# Altium PCB Final PCB.PcbDoc
Units mm, origin at the board's own origin, x right, y up, seen from the top; angles counter-clockwise.
Board outline 122.55 x 36.83 mm, 2 copper layers (Top Layer, Bottom Layer); 53 components, 47 nets, 187 pads, 0 vias.
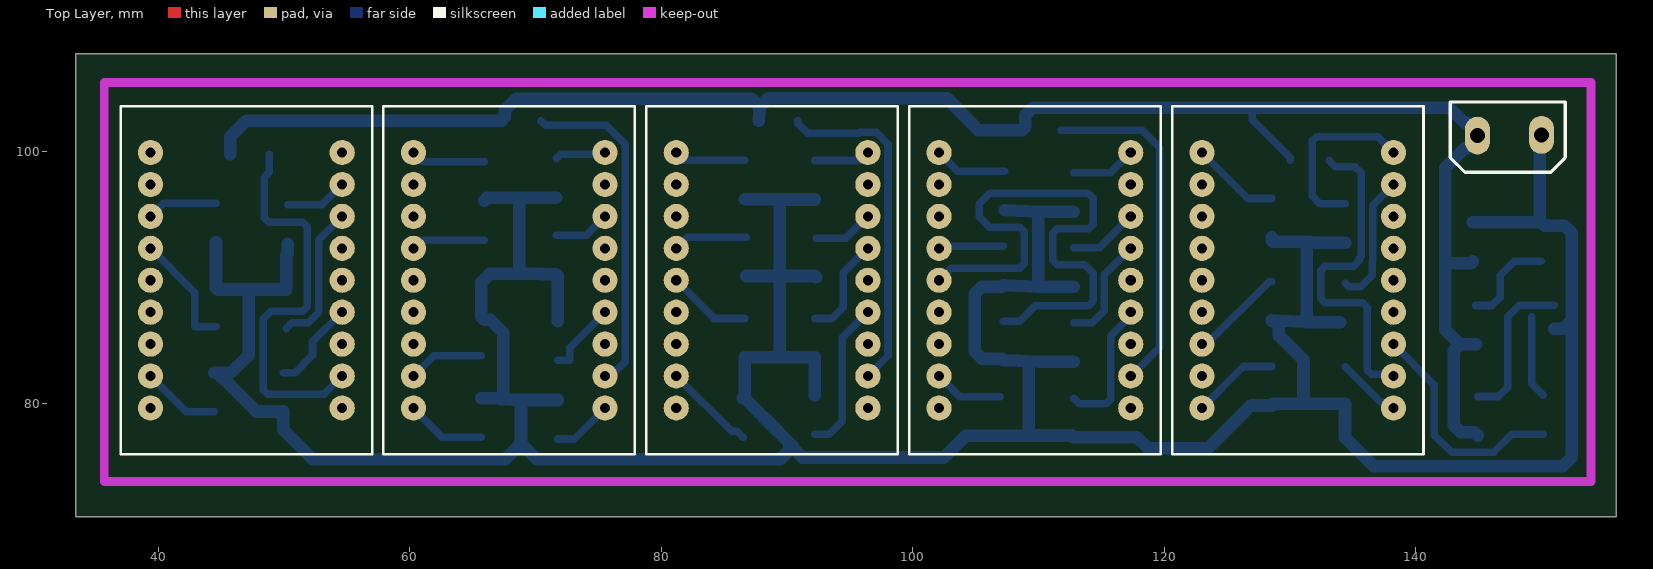
[diagram p0: Top Layer view]
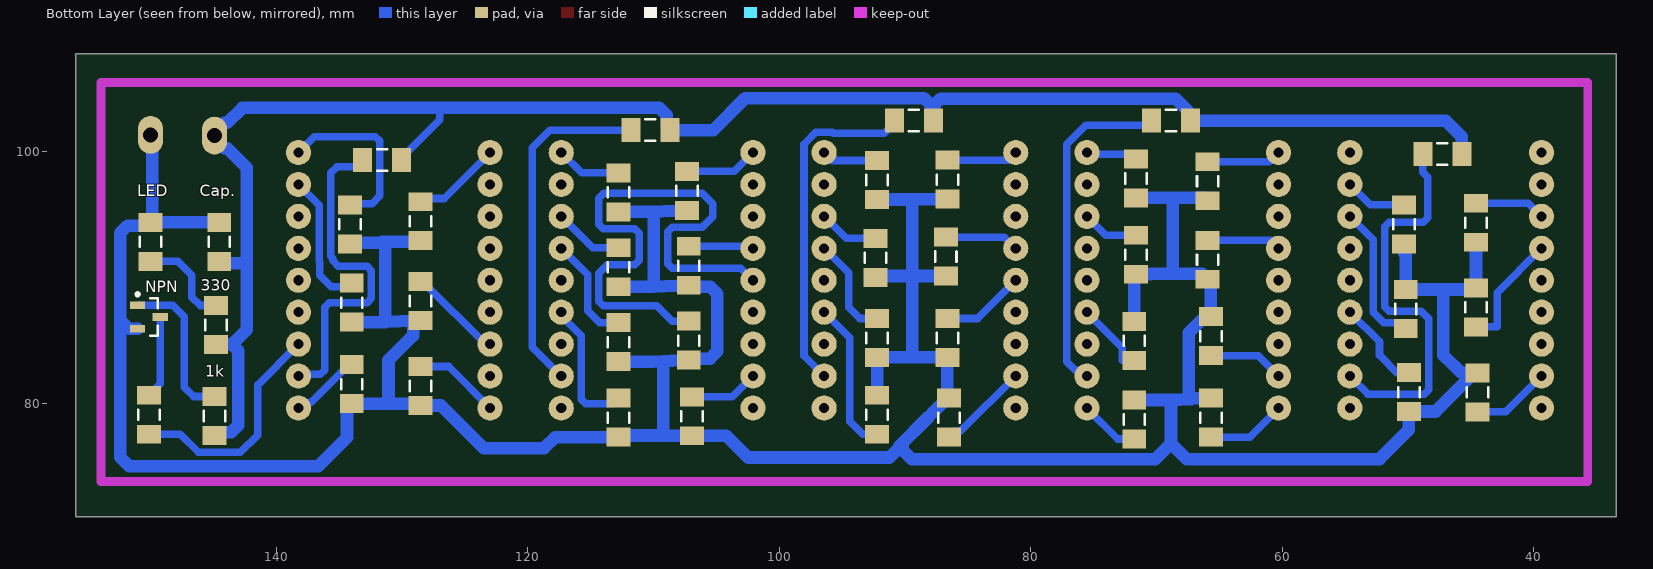
[diagram p1: Bottom Layer view, seen from below]

## Layer stack, top to bottom
Top Solder: solder mask 0.0102, Solder Resist, Dk 3.5
Top Layer: signal copper 0.0356
Dielectric 1: dielectric 0.32, FR-4, Dk 4.8
Bottom Layer: signal copper 0.0356
Bottom Solder: solder mask 0.0102, Solder Resist, Dk 3.5

## Board outline
33.401,70.993 155.956,70.993 155.956,107.823 33.401,107.823

## Design rules (kind name [scope] priority, off if disabled: settings)
Clearance [All] p1: gap=0.3 ignorepadtopadclearanceinfootprint=FALSE
PolygonConnect [All] p1: connectstyle=Relief reliefconductorwidth=0.254 reliefentries=4 polygonreliefangle="90 Angle" airgapwidth=0.254
RoutingVias [All] p1: holewidth=0.711 width=1.27 viastyle="Through Hole" minholewidth=0.711 minwidth=1.27 maxholewidth=0.711 maxwidth=1.27
SolderMaskExpansion [All] p1: expansion=0.102 istentingtop=FALSE
Width [All] p1: maxlimit=1.2 minlimit=0.6 preferedwidth=0.6
30 further rules are at their usual default settings.

## Components (designator, comment, footprint, x,y, rotation, side; value= is the part's Value field where it differs from the comment)
1k "Comment" RESC3216M#1 144.907,78.994 r270 bottom
330 "Comment" RESC3216M#1 144.78,86.233 r270 bottom
Cap. "Comment" RESC3216M#1 144.526,92.837 r270 bottom
LED "Comment" RESC3216M#1 149.987,92.837 r270 bottom
NPN "Comment" SOT23-3L 150.114,86.868 r180 bottom
? "Comment" Kingbright_PSA08-12SRWA_0 109.703,89.789 r180 top
? "Comment" RESC3216M#2 133.985,81.534 r90 bottom
? "Comment" RESC3216M#1 128.524,88.138 r270 bottom
? "Comment" RESC3216M#3 134.112,94.234 r90 bottom
? "Comment" RESC3216M#4 128.524,81.381 r270 bottom
? "Comment" RESC3216M#1 128.524,94.488 r90 bottom
? "Comment" RESC3216M#1 133.985,88.011 r270 bottom
? "Comment" RESC3216M#1 112.776,84.865 r90 bottom
? "Comment" RESC3216M#1 112.776,90.82 r270 bottom
? "Comment" RESC3216M#5 112.776,96.774 r90 bottom
? "Comment" RESC3216M#4 107.188,84.992 r270 bottom
? "Comment" RESC3216M#1 107.315,96.901 r90 bottom
? "Comment" RESC3216M#1 107.188,90.947 r270 bottom
? "Comment" RESC3216M#1 92.202,85.199 r90 bottom
? "Comment" RESC3216M#1 86.487,78.867 r90 bottom
? "Comment" RESC3216M#3 92.202,97.764 r90 bottom
? "Comment" RESC3216M#4 86.614,85.199 r270 bottom
? "Comment" RESC3216M#1 86.614,97.79 r90 bottom
? "Comment" RESC3216M#6 86.741,91.676 r270 bottom
? "Comment" RESC3216M#1 71.755,84.963 r270 bottom
? "Comment" RESC3216M#6 71.628,91.821 r270 bottom
? "Comment" RESC3216M#3 71.628,97.885 r90 bottom
? "Comment" RESC3216M#7 65.659,85.344 r90 bottom
? "Comment" RESC3216M#6 65.913,97.663 r90 bottom
? "Comment" RESC3216M#1 65.913,91.414 r270 bottom
? "Comment" "PCB Block Connector" 147.44,101.323 r0 top
? "Comment" RESC3216M#1 131.572,99.346 r180 bottom
? "Comment" RESC3216M#1 65.659,78.867 r270 bottom
? "Comment" RESC3216M#6 71.755,78.714 r270 bottom
? "Comment" RESC3216M#1 106.934,78.968 r270 bottom
? "Comment" RESC3216M#1 89.281,102.489 r180 bottom
? "Comment" RESC3216M#1 150.114,79.095 r270 bottom
? "Comment" RESC3216M#1 110.236,101.727 r180 bottom
? "Comment" RESC3216M#1 44.577,87.63 r270 bottom
? "Comment" RESC3216M#1 44.577,94.361 r90 bottom
? "Comment" RESC3216M#4 44.45,80.873 r270 bottom
? "Comment" RESC3216M#3 50.292,94.234 r90 bottom
? "Comment" RESC3216M#1 50.165,87.503 r270 bottom
? "Comment" RESC3216M#1 49.911,80.899 r90 bottom
? "Comment" RESC3216M#1 92.329,91.567 r90 bottom
? "Comment" RESC3216M#1 92.202,79.095 r270 bottom
? "Comment" RESC3216M#1 47.244,99.822 r180 bottom
? "Comment" RESC3216M#1 68.834,102.489 r180 bottom
? "Comment" RESC3216M#1 112.776,78.867 r270 bottom
? "Comment" Kingbright_PSA08-12SRWA_0 46.99,89.789 r180 top
? "Comment" Kingbright_PSA08-12SRWA_0 67.894,89.789 r180 top
? "Comment" Kingbright_PSA08-12SRWA_0 130.607,89.789 r180 top
? "Comment" Kingbright_PSA08-12SRWA_0 88.799,89.789 r180 top

## Footprints (in the part's own frame and the unit in brackets; to place one, negate y for a bottom-side part, rotate by r counter-clockwise, add the part's x,y. Pads: shape width x height; smd on the part's side, far side on the other; paste and mask are expansions set on the pad)
Kingbright_PSA08-12SRWA_0 [mm]
  round 2 hole 0.8 paste-1000 mask+0: 1(-7.62,10.16) 2(-7.62,7.62) 3(-7.62,5.08) 4(-7.62,2.54) 5(-7.62,0) 6(-7.62,-2.54) 7(-7.62,-5.08) 8(-7.62,-7.62) 9(-7.62,-10.16) 10(7.62,-10.16) 11(7.62,-7.62) 12(7.62,-5.08) 13(7.62,-2.54) 14(7.62,0) 15(7.62,2.54) 16(7.62,5.08) 17(7.62,7.62) 18(7.62,10.16)
  silkscreen extent -10,-13.85 10,13.85, body extent -10.23,-14.08 10.23,14.08, height 0.25
"PCB Block Connector" [mm]
  oval 2x3 hole 1.2: 1(-2.547,-0.023) 2(2.547,0.023)
  silkscreen extent -4.7,-2.94 4.44,2.65
RESC3216M#1 [mm] "Chip Resistor, Body 3.2x1.6mm, IPC Low Density"
  rect 1.5x1.9 smd: 1(-1.55,0) 2(1.55,0)
  silkscreen extent -0.4,-0.85 0.4,0.85, body extent -1.68,-0.87 1.68,0.87, height 0.71
RESC3216M#2 [mm] "Chip Resistor, Body 3.2x1.6mm, IPC Low Density"
  rect 1.5x1.9 smd: 2(1.55,0) ""(-1.55,0)
  silkscreen extent -0.4,-0.85 0.4,0.85, body extent -1.68,-0.87 1.68,0.87, height 0.71
RESC3216M#3 [mm] "Chip Resistor, Body 3.2x1.6mm, IPC Low Density"
  rect 1.5x1.9 smd: 1(-1.55,0) mj(1.55,0)
  silkscreen extent -0.4,-0.85 0.4,0.85, body extent -1.68,-0.87 1.68,0.87, height 0.71
RESC3216M#4 [mm] "Chip Resistor, Body 3.2x1.6mm, IPC Low Density"
  rect 1.5x1.9 smd: 2(1.55,0) gnd(-1.55,0)
  silkscreen extent -0.4,-0.85 0.4,0.85, body extent -1.68,-0.87 1.68,0.87, height 0.71
RESC3216M#5 [mm] "Chip Resistor, Body 3.2x1.6mm, IPC Low Density"
  rect 1.5x1.9 smd: a(-1.55,0) mj(1.55,0)
  silkscreen extent -0.4,-0.85 0.4,0.85, body extent -1.68,-0.87 1.68,0.87, height 0.71
RESC3216M#6 [mm] "Chip Resistor, Body 3.2x1.6mm, IPC Low Density"
  rect 1.5x1.9 smd: 1(-1.55,0) ""(1.55,0)
  silkscreen extent -0.4,-0.85 0.4,0.85, body extent -1.68,-0.87 1.68,0.87, height 0.71
RESC3216M#7 [mm] "Chip Resistor, Body 3.2x1.6mm, IPC Low Density"
  rect 1.5x1.9 smd: ""(-1.55,0) ""(1.55,0)
  silkscreen extent -0.4,-0.85 0.4,0.85, body extent -1.68,-0.87 1.68,0.87, height 0.71
SOT23-3L [mm] "SOT23, 3-Leads, Body 2.9x1.3mm, Pitch 0.95mm, Lead Span 2.5mm, IPC High Density"
  rect 1.2x0.6 smd: 1(-0.9,0.95) 2(-0.9,-0.95) 3(0.9,0)
  silkscreen extent -1.02,-1.5 0.7,1.92, body extent -0.7,-1.5 0.7,1.5, height 1.1

## Nets (pads, with @x,y where several pads share a name; then routed paths per layer and width w, separated by ;. In a path a pad name is that pad's centre, name@x,y a point inside that pad or via, vN(x,y) a via of type N, cw(c..) or ccw(c..) an arc to the next point about the centre after c; other vN are vias at no path point)
aa1: ?.2@86.614,99.34 ?.10@81.179,99.949 | length 5.7
  Bottom Layer w0.6: ?.10@81.179,99.949 81.787,99.34 ?.2@86.614,99.34
aa2: ?.9@96.419,99.949 ?.mj@92.202,99.314 | length 4.5
  Bottom Layer w0.6: ?.mj@92.202,99.314 95.784,99.314 ?.9@96.419,99.949
ab: ?.2@92.329,93.117 ?.7@96.419,94.869 | length 4.8
  Bottom Layer w0.6: ?.2@92.329,93.117 94.667,93.117 ?.7@96.419,94.869
ac: ?.2@92.202,77.545 ?.4@96.419,87.249 | length 12.1
  Bottom Layer w0.6: ?.2@92.202,77.545 93.345,77.545 94.386,78.586 94.386,85.217 ?.4@96.419,87.249
ae: ?.1@86.487,77.317 ?.17@81.179,82.169 | length 7.3
  Bottom Layer w0.6: ?.17@81.179,82.169 85.581,77.767 86.037,77.767 ?.1@86.487,77.317
af: ?.1@86.741,93.226 ?.13@81.179,92.329 | length 5.9
  Bottom Layer w0.6: ?.13@81.179,92.329 82.076,93.226 ?.1@86.741,93.226
ag1: ?.14@81.179,89.789 ?.gnd@86.614,86.749 | length 6.7
  Bottom Layer w0.6: ?.14@81.179,89.789 84.218,86.749 ?.gnd@86.614,86.749
ag2: ?.2@92.202,86.749 ?.6@96.419,92.329 | length 8.1
  Bottom Layer w0.6: ?.2@92.202,86.749 93.582,86.749 94.463,87.63 94.463,90.373 ?.6@96.419,92.329
ba1: ?.2@107.315,98.451 ?.10@102.083,99.949 | length 5.9
  Bottom Layer w0.6: ?.10@102.083,99.949 103.581,98.451 ?.2@107.315,98.451
ba2: ?.9@117.323,99.949 ?.mj@112.776,98.324 | length 5.2
  Bottom Layer w0.6: ?.mj@112.776,98.324 115.698,98.324 ?.9@117.323,99.949
bb: ?.1@112.776,92.37 ?.7@117.323,94.869 | length 5.6
  Bottom Layer w0.6: ?.1@112.776,92.37 114.823,92.37 ?.7@117.323,94.869
bc: ?.1@112.776,80.417 ?.4@117.323,87.249 | length 10.9
  Bottom Layer w0.6: ?.1@112.776,80.417 113.226,79.967 115.371,79.967 115.723,80.318 115.723,85.372 117.323,86.972 ?.4@117.323,87.249
be: ?.1@106.934,80.518 ?.17@102.083,82.169 | length 5.5
  Bottom Layer w0.6: ?.17@102.083,82.169 103.734,80.518 ?.1@106.934,80.518
bf: ?.1@107.188,92.497 ?.13@102.083,92.329 | length 5.2
  Bottom Layer w0.6: ?.13@102.083,92.329 102.25,92.497 ?.1@107.188,92.497
bg1: ?.14@102.083,89.789 ?.gnd@107.188,86.542 | length 45.9
  Bottom Layer w0.6: ?.14@102.083,89.789 103.041,90.747 108.488,90.747 108.839,91.098 108.839,93.65 108.488,94.001 106.116,94.001 105.283,94.834 105.283,95.868 106.116,96.701 113.945,96.701 114.351,96.296 114.351,94.25 113.975,93.874 111.476,93.874 111.125,93.523 111.125,91.371 111.476,91.02 113.665,91.02 114.326,90.359 114.326,88.117 113.975,87.765 109.732,87.765 108.509,86.542 ?.gnd@107.188,86.542
bg2: ?.2@112.776,86.415 ?.6@117.323,92.329 | length 8.7
  Bottom Layer w0.6: ?.2@112.776,86.415 114.27,86.415 115.226,87.371 115.226,90.232 ?.6@117.323,92.329
gnd: ?.1@44.577,89.18 ?.1@44.577,92.811 ?.1@49.911,79.349 ?.1@50.165,89.053 ?.1@50.292,92.684 ?.1@65.659,80.417 ?.1@65.913,96.113 ?.1@71.628,96.335 ?.1@71.755,80.264 ?.1@71.755,86.513 ?.1@86.614,96.24 ?.1@92.202,80.645 ?.1@92.202,83.65 ?.1@92.202,96.214 ?.1@92.329,90.017 ?.1@107.315,95.351 ?.1@112.776,83.316 ?.1@128.524,92.938 ?.1@134.112,92.684 ?.2@65.913,89.864 ?.2@86.487,80.417 ?.2@86.614,83.65 ?.2@106.934,77.418 ?.2@107.188,83.443 ?.2@107.188,89.397 ?.2@112.776,77.317 ?.2@112.776,89.27 ?.2@128.524,79.831 ?.2@128.524,86.588 ?.2@133.985,86.461 ?.2@149.987,101.346 ?.@65.659,86.894 ?.@71.628,90.271 ?.@86.741,90.127 ?.@133.985,79.984 ?.a ?.gnd@44.45,82.423 Cap..1 LED.1 NPN.2 | length 326.2
  Bottom Layer w1: ?.gnd@44.45,82.423 ?.gnd@44.704,82.423 ; ?.1@44.577,92.811 44.577,89.18 44.704,89.053 47.397,89.053 ; ?.1@50.292,92.684 50.292,91.921 50.165,91.794 50.165,89.053 47.397,89.053 ; ?.1@65.659,80.417 67.23,80.417 ; ?.1@65.913,96.113 66.104,96.335 68.707,96.335 ; 67.23,80.342 68.834,80.265 ; 67.409,80.333 67.409,85.626 66.391,86.644 65.909,86.644 65.659,86.894 65.659,89.61 65.913,89.864 66.363,90.314 68.707,90.314 ; ?.1@71.628,96.335 68.707,96.335 ; ?.1@71.755,80.264 68.86,80.264 68.834,80.265 ; ?.1@71.755,86.513 71.755,90.144 71.628,90.271 70.485,90.271 70.485,90.314 68.707,90.314 ; ?.2@86.487,80.417 ?.2@86.614,80.417 ; ?.1@86.614,96.24 89.383,96.24 89.408,96.215 89.408,90.127 ; ?.@86.741,90.127 89.408,90.127 ; 87.757,79.274 ?.2@86.614,80.417 ; 88.096,78.935 88.376,78.655 90.17,76.861 ; 89.409,96.214 ?.1@92.202,96.214 ; ?.1@92.202,80.645 92.202,83.65 89.408,83.65 ; ?.1@92.329,90.017 92.219,90.127 89.408,90.127 ; ?.1@107.315,95.351 110.109,95.224 ?.a ; 109.971,95.23 109.971,89.273 ; ?.2@112.776,77.317 ?.2@112.675,77.418 ; ?.1@112.776,83.316 110.033,83.316 109.22,83.352 ; ?.2@112.776,89.27 110.033,89.27 109.971,89.273 ; ?.2@112.976,77.317 117.795,77.317 118.68,76.432 123.498,76.432 126.897,79.831 128.524,79.831 128.662,79.984 131.064,79.984 ; ?.2@128.524,86.588 129.124,86.562 131.191,86.474 131.318,86.469 ; ?.1@128.524,92.938 128.625,92.837 131.572,92.837 ; ?.1@128.524,93.192 ?.1@128.774,92.942 ; ?.2@128.662,86.582 129.106,86.138 129.106,85.397 131.064,83.439 131.064,79.984 ; ?.2@133.985,86.461 131.496,86.461 131.318,86.469 ; ?.1@134.366,92.779 131.318,92.779 131.318,86.469 ; Cap..1 LED.1 ; ?.2@149.987,101.346 149.86,101.219 149.86,94.514 LED.1 ; NPN.2 151.689,85.918 152.4,86.629 ; ?.gnd@44.704,82.423 45.72,82.423 46.984,83.643 47.168,83.82 47.168,88.824 47.397,89.053 ; ?.gnd@44.704,82.423 44.704,82.369 44.9,82.173 44.954,82.173 47.778,79.349 49.911,79.349 49.911,77.902 52.248,75.565 67.589,75.565 68.834,76.81 ; 68.707,90.314 68.707,96.335 ; 68.834,76.81 70.079,75.565 89.457,75.565 90.17,76.278 90.17,76.861 ; 68.834,76.81 68.834,80.265 ; ?.2@86.614,80.417 86.614,83.65 89.408,83.65 ; 89.408,83.65 89.408,90.127 ; 90.17,76.861 90.452,76.579 90.452,76.464 91.224,75.692 102.465,75.692 104.191,77.418 106.934,77.418 109.22,77.418 ?.2@112.675,77.418 ; 109.22,83.352 109.22,77.47 112.623,77.47 ?.2@112.675,77.418 ; 109.22,83.352 108.509,83.384 107.188,83.443 107.067,83.564 105.488,83.564 104.902,84.149 104.902,88.69 105.488,89.276 107.067,89.276 107.188,89.397 109.971,89.273 ; 131.064,79.984 133.985,79.984 134.366,79.984 134.366,77.292 136.664,74.994 151.675,74.994 152.4,75.719 152.4,86.629 ; LED.1 150.237,94.137 151.814,94.137 152.414,93.537 152.414,87.187 152.4,87.173 152.4,86.629
mb: ?.2@50.165,85.953 ?.7@54.61,94.869 | length 11.5
  Bottom Layer w0.6: ?.2@50.165,85.953 50.615,86.403 51.908,86.403 52.742,87.237 52.742,93.001 ?.7@54.61,94.869
mc: ?.2@49.911,82.449 ?.4@54.61,87.249 | length 7.3
  Bottom Layer w0.6: ?.2@49.911,82.449 50.877,82.449 52.248,83.82 52.248,84.887 ?.4@54.61,87.249
me: ?.2@44.45,79.323 ?.17@39.37,82.169 | length 6.3
  Bottom Layer w0.6: ?.17@39.37,82.169 42.216,79.323 ?.2@44.45,79.323
mf: ?.2@44.577,86.08 ?.13@39.37,92.329 | length 9.4
  Bottom Layer w0.6: ?.13@39.37,92.329 42.901,88.798 42.901,86.08 ?.2@44.577,86.08
mh: ?.2@44.577,95.911 ?.12@39.37,94.869 | length 5.6
  Bottom Layer w0.6: ?.12@39.37,94.869 40.412,95.911 ?.2@44.577,95.911
mj: ?.8@54.61,97.409 ?.mj@50.292,95.784 | length 5
  Bottom Layer w0.6: ?.mj@50.292,95.784 52.985,95.784 ?.8@54.61,97.409
oa1: ?.10@60.274,99.949 ?.@65.913,99.213 | length 5.9
  Bottom Layer w0.6: ?.10@60.274,99.949 61.01,99.213 ?.@65.913,99.213
oa2: ?.9@75.514,99.949 ?.mj@71.628,99.435 | length 4.1
  Bottom Layer w0.6: ?.mj@71.628,99.435 72.01,99.816 73.019,99.816 73.025,99.822 75.387,99.822 ?.9@75.514,99.949
ob: ?.1@71.628,93.371 ?.7@75.514,94.869 | length 4.5
  Bottom Layer w0.6: ?.1@71.628,93.371 74.016,93.371 ?.7@75.514,94.869
oc: ?.2@71.755,83.413 ?.4@75.514,87.249 | length 5.9
  Bottom Layer w0.6: ?.2@71.755,83.413 72.695,83.413 72.695,84.43 ?.4@75.514,87.249
od1: ?.2@65.659,77.317 ?.18@60.274,79.629 | length 6.3
  Bottom Layer w0.6: ?.18@60.274,79.629 62.586,77.317 ?.2@65.659,77.317
od2: ?.1@75.514,79.629 ?.@71.755,77.164 | length 4.8
  Bottom Layer w0.6: ?.@71.755,77.164 73.049,77.164 ?.1@75.514,79.629
oe: ?.17@60.274,82.169 ?.@65.659,83.794 | length 6.1
  Bottom Layer w0.6: ?.17@60.274,82.169 61.899,83.794 ?.@65.659,83.794
of: ?.1@65.913,92.964 ?.13@60.274,92.329 | length 5.9
  Bottom Layer w0.6: ?.13@60.274,92.329 60.909,92.964 ?.1@65.913,92.964
vcc: 1k.2 330.2 ?.1@144.893,101.301 ?.2@45.694,99.822 ?.2@67.284,102.489 ?.2@87.731,102.489 ?.2@108.686,101.727 ?.2@130.022,99.346 Cap..2 | length 143.3
  Bottom Layer w0.6: 127,103.505 127,102.568 130.022,99.546 ?.2@130.022,99.346
  Bottom Layer w1: ?.2@45.694,99.822 45.694,101.193 46.99,102.489 67.284,102.489 67.534,102.739 67.534,103.3 68.473,104.239 87.15,104.239 87.807,103.582 ; ?.2@87.731,102.489 87.807,103.582 ; Cap..2 144.397,91.158 142.326,91.158 ; 330.2 143.51,84.683 ; 1k.2 144.657,77.694 143.588,77.694 143.002,78.28 143.002,84.175 143.51,84.683 ; 87.807,103.582 88.493,104.267 102.692,104.267 105.232,101.727 108.686,101.727 108.936,101.977 108.936,102.919 109.522,103.505 127,103.505 142.689,103.505 143.893,102.301 144.122,102.301 144.893,101.53 144.893,101.071 144.122,100.301 143.893,100.301 142.326,98.734 142.326,91.158 ; 142.326,91.158 142.326,85.867 143.51,84.683
vcc0: ?.1@70.384,102.489 ?.2@75.514,82.169 | length 26.9
  Bottom Layer w0.6: ?.1@70.384,102.489 70.765,102.108 75.618,102.108 77.114,100.612 77.114,83.317 76.484,82.687 76.411,82.687 75.893,82.169 ?.2@75.514,82.169
vcca: ?.1@90.831,102.489 ?.2@96.419,82.169 | length 27.2
  Bottom Layer w0.6: ?.1@90.831,102.489 90.831,102.289 91.622,101.498 95.705,101.498 95.756,101.549 97.081,101.549 98.019,100.612 98.019,83.769 ?.2@96.419,82.169
vcca1: ?.1@111.786,101.727 ?.2@117.323,82.169 | length 27.5
  Bottom Layer w0.6: ?.1@111.786,101.727 118.237,101.727 119.62,100.344 119.62,84.466 ?.2@117.323,82.169
vccm: ?.1@48.794,99.822 ?.2@54.61,82.169 | length 31.9
  Bottom Layer w0.6: ?.1@48.794,99.822 48.794,98.375 48.412,97.993 48.412,94.763 48.764,94.412 51.491,94.412 51.842,94.06 51.842,87.673 51.491,87.322 48.942,87.322 48.336,86.716 48.336,81.073 48.688,80.721 53.162,80.721 ?.2@54.61,82.169
vccz: ?.1@133.122,99.346 ?.2@138.227,82.169 | length 27
  Bottom Layer w0.6: ?.1@133.122,99.346 133.122,99.281 133.572,98.831 135.158,98.831 135.662,98.327 135.662,91.685 135.509,91.532 135.509,91.373 135.047,90.911 132.769,90.911 132.418,90.56 132.418,88.362 132.769,88.011 135.793,88.011 136.144,87.66 136.144,82.648 136.495,82.296 138.1,82.296 ?.2@138.227,82.169
x1: 1k.1 NPN.1 | length 12.4
  Bottom Layer w0.6: 1k.1 146.559,80.544 147.295,81.28 147.295,86.895 148.217,87.818 NPN.1
x2: 330.1 LED.2 | length 7.7
  Bottom Layer w0.6: 330.1 146.05,87.783 146.71,88.443 146.71,90.17 147.827,91.287 LED.2
x3: ?.1@150.114,80.645 NPN.3 | length 6.6
  Bottom Layer w0.6: NPN.3 149.214,81.545 ?.1@150.114,80.645
za1: ?.2@128.524,96.038 ?.10@122.987,99.949 | length 7.1
  Bottom Layer w0.6: ?.10@122.987,99.949 126.644,96.292 ?.2@128.524,96.292
za2: ?.9@138.227,99.949 ?.mj@134.112,95.784 | length 14.4
  Bottom Layer w0.6: ?.mj@134.366,95.879 132.372,95.879 131.75,96.501 131.75,100.868 132.101,101.219 136.957,101.219 ?.9@138.227,99.949
zd1: ?.18@122.987,79.629 ?.gnd@128.524,82.931 | length 6.9
  Bottom Layer w0.6: ?.18@122.987,79.629 126.289,82.931 ?.gnd@128.524,82.931
zd2: ?.1@138.227,79.629 ?.2@133.985,83.084 | length 5.2
  Bottom Layer w0.6: ?.2@134.366,82.903 134.846,82.423 134.874,82.423 137.204,80.093 137.384,80.093 137.848,79.629 ?.1@138.227,79.629
zdp: ?.2@150.114,77.545 ?.3@138.227,84.709 | length 18.4
  Bottom Layer w0.6: ?.3@138.227,84.709 141.478,81.458 141.478,77.47 142.854,76.094 146.174,76.094 147.625,77.545 ?.2@150.114,77.545
zj: ?.1@133.985,89.561 ?.8@138.227,97.409 | length 10.6
  Bottom Layer w0.6: ?.1@134.366,89.561 134.646,89.281 135.61,89.281 136.525,90.196 136.525,91.276 136.562,91.313 136.562,95.744 ?.8@138.227,97.409
zm: ?.1@128.524,89.688 ?.16@122.987,84.709 | length 7.6
  Bottom Layer w0.6: ?.16@122.987,84.709 123.345,84.709 128.324,89.688 ?.1@128.524,89.688
pads on no net: ?.1@54.61,79.629 ?.1@96.419,79.629 ?.1@117.323,79.629 ?.3@54.61,84.709 ?.3@75.514,84.709 ?.3@96.419,84.709 ?.3@117.323,84.709 ?.4@138.227,87.249 ?.5 ?.6@54.61,92.329 ?.6@75.514,92.329 ?.6@138.227,92.329 ?.7@138.227,94.869 ?.8@75.514,97.409 ?.8@96.419,97.409 ?.8@117.323,97.409 ?.9@54.61,99.949 ?.10@39.37,99.949 ?.11 ?.12@60.274,94.869 ?.12@81.179,94.869 ?.12@102.083,94.869 ?.12@122.987,94.869 ?.13@122.987,92.329 ?.14@39.37,89.789 ?.14@60.274,89.789 ?.14@122.987,89.789 ?.15 ?.16@39.37,84.709 ?.16@60.274,84.709 ?.16@81.179,84.709 ?.16@102.083,84.709 ?.17@122.987,82.169 ?.18@39.37,79.629 ?.18@81.179,79.629 ?.18@102.083,79.629

## Keep-outs
Keep-Out Layer:
  lines w0.7: 35.687,73.787 35.687,105.505 153.924,105.505 153.924,73.787 35.687,73.787